# Altium PCB 显示部分Votage diaplay ADC.PcbDoc
Units mm, origin at the board's own origin, x right, y up, seen from the top; angles counter-clockwise.
Board outline 55.5 x 75.5 mm, 2 copper layers (Top Layer, Bottom Layer); 21 components, 0 nets, 99 pads, 0 vias.
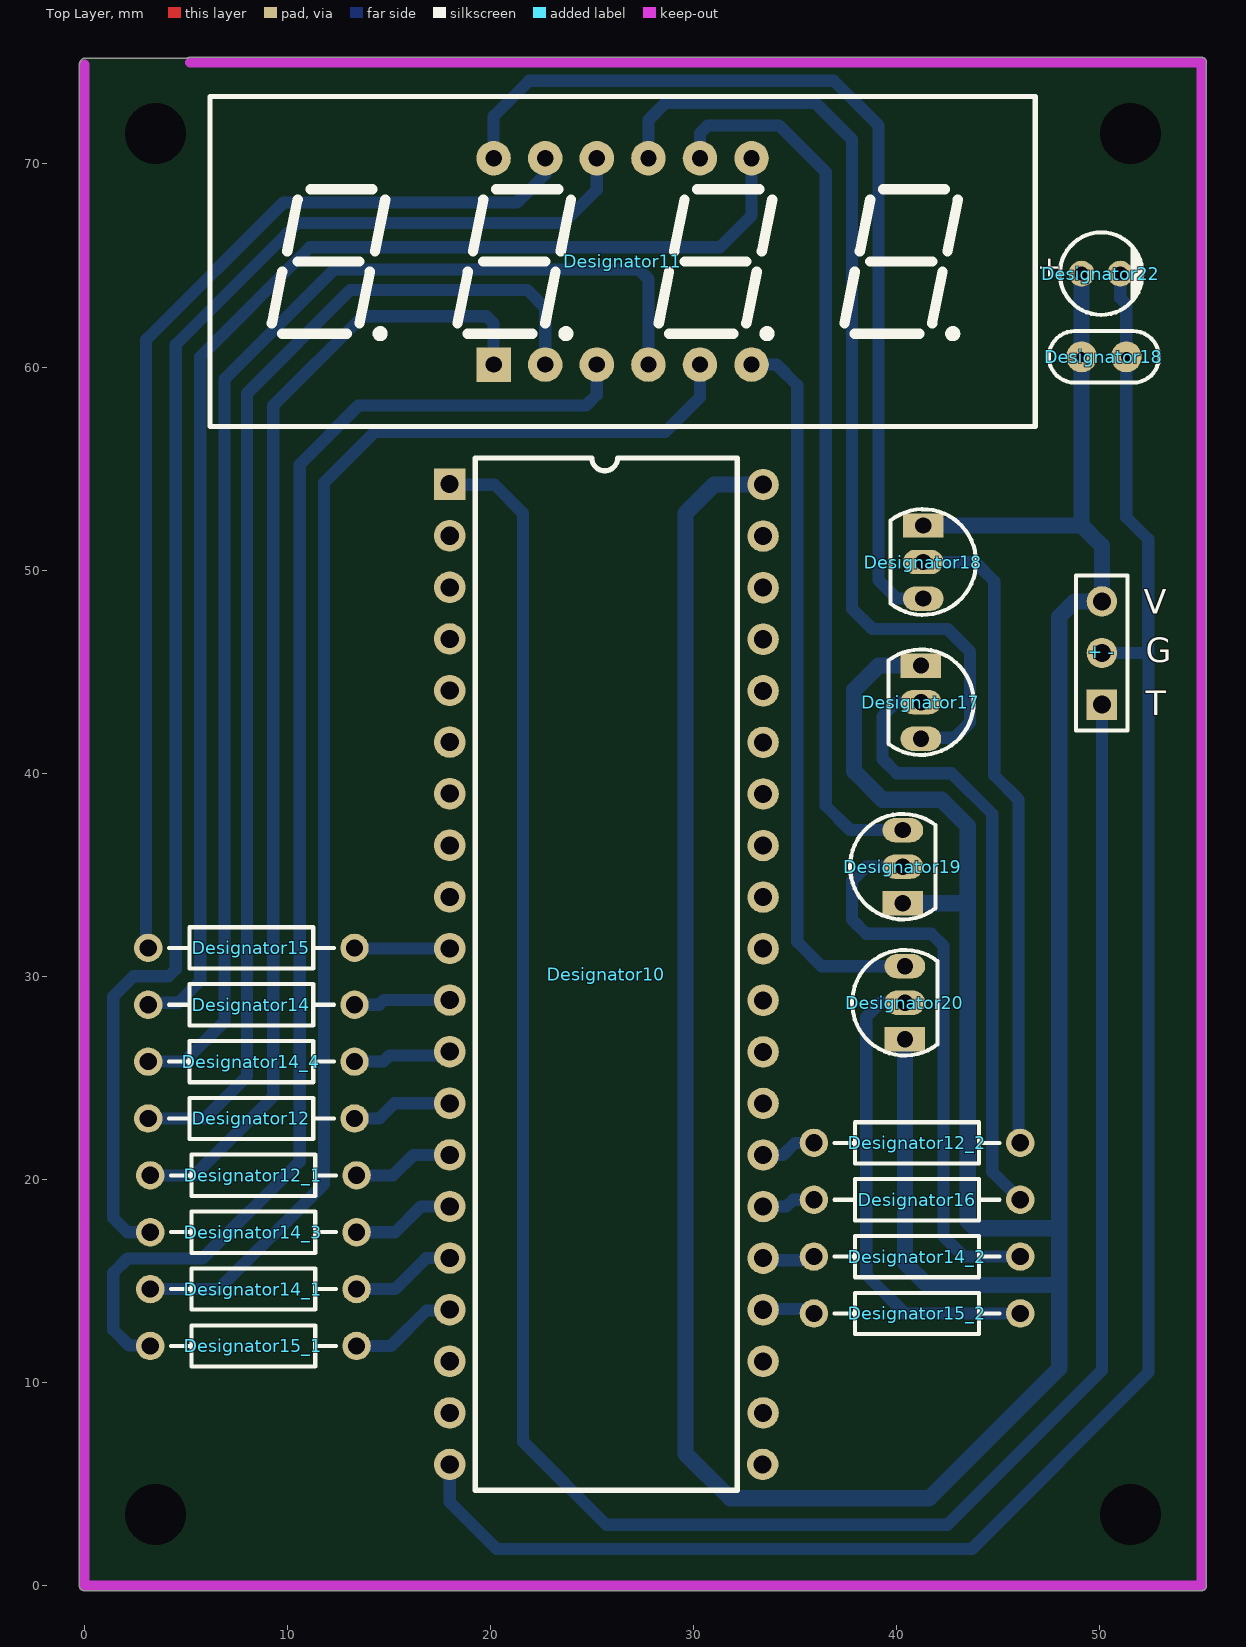
[diagram p0: Top Layer view]
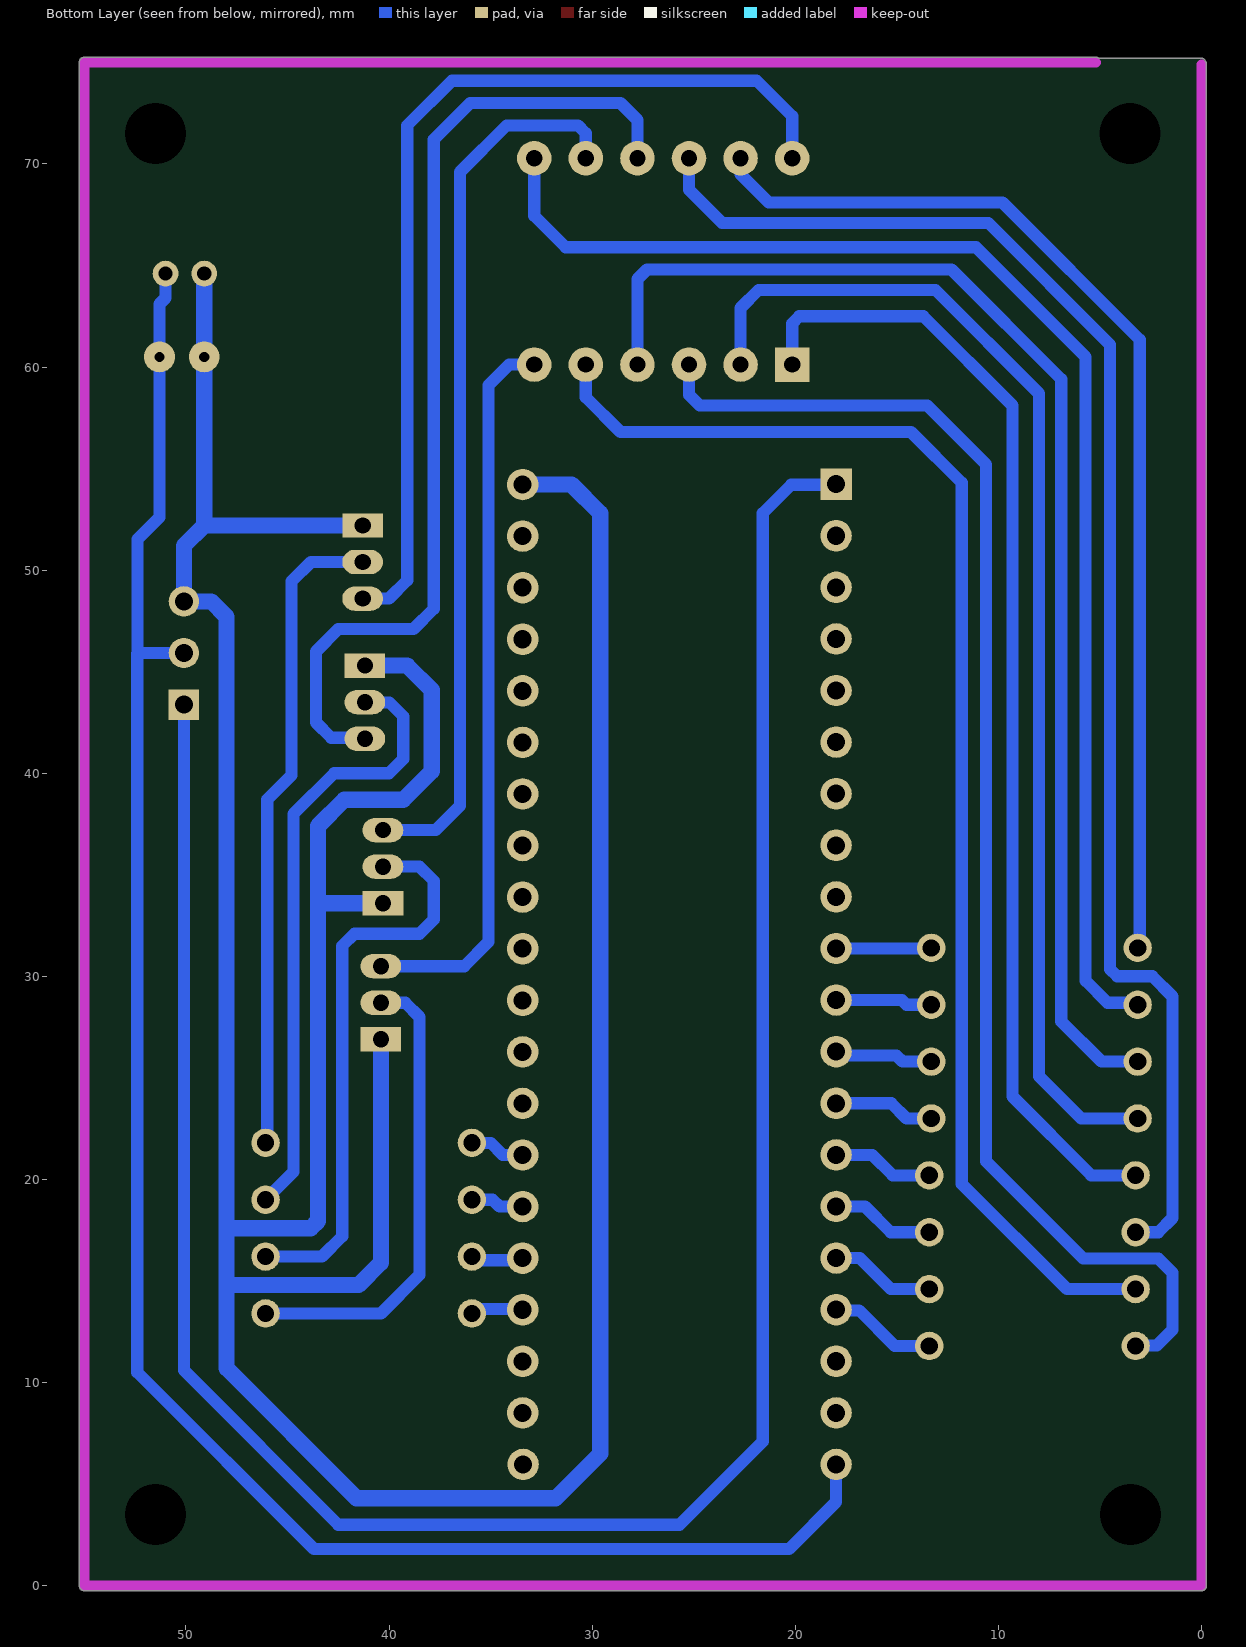
[diagram p1: Bottom Layer view, seen from below]

## Layer stack, top to bottom
Top Solder: solder mask 0.0102, Solder Resist, Dk 3.5
Top Layer: signal copper 0.0356
Dielectric 1: dielectric 0.32, FR-4, Dk 4.8
Bottom Layer: signal copper 0.0356
Bottom Solder: solder mask 0.0102, Solder Resist, Dk 3.5

## Board outline
-0.25,0 -0.25,12.5 cw(c0,12.5) -0.25,12.501 -0.25,62.5 -0.25,74.9 cw(c0,74.9) -0.19,75.063 cw(c0,75) 0,75.2 5.05,75.2 cw(c5.2,75) 5.2,75.25 55,75.25 cw(c55,75) 55.25,75 55.25,0 cw(c55,0) 55,-0.25 0.002,-0.25 cw(c0,0)

## Design rules (kind name [scope] priority, off if disabled: settings)
Clearance [All] p1: gap=0.254 ignorepadtopadclearanceinfootprint=FALSE except(0: Arc-Hole Track-Hole SMDPad-Hole THPad-Hole Via-Hole Fill-Hole Poly-Hole Region-Hole Text-Hole)
PolygonConnect [All] p1: connectstyle=Relief reliefconductorwidth=0.254 reliefentries=4 polygonreliefangle="90 Angle" airgapwidth=0.254
RoutingVias [All] p1: holewidth=0.5 width=1 viastyle="Through Hole" minholewidth=0.3 minwidth=0.5 maxholewidth=0.1 maxwidth=1.2
SolderMaskExpansion [All] p1: expansion=0.102 istentingtop=FALSE
Width [All] p1: maxlimit=1 minlimit=0.3 preferedwidth=0.8 minimp=50.000000 maximp=50.000000 favimp=50.000000
30 further rules are at their usual default settings.

## Components (designator, comment, footprint, x,y, rotation, side; value= is the part's Value field where it differs from the comment)
"+ -" "Comment" HDR1X3 50.1,43.38 r90 top
Designator10 "Comment" "DIP40 - SocKet1" 25.7,30.1 r0 top
Designator11 "Comment" "SMG 0.4-4P" 26.5,65.2 r0 top
Designator12 "Comment" AXIAL-0.4 8.22,23 r180 top
Designator12_1 "Comment" AXIAL-0.4 8.32,20.2 r0 top
Designator12_2 "Comment" AXIAL-0.4 41,21.8 r0 top
Designator14 "Comment" AXIAL-0.4 8.22,28.6 r180 top
Designator14_1 "Comment" AXIAL-0.4 8.32,14.6 r0 top
Designator14_2 "Comment" AXIAL-0.4 41,16.2 r0 top
Designator14_3 "Comment" AXIAL-0.4 8.32,17.4 r0 top
Designator14_4 "Comment" AXIAL-0.4 8.22,25.8 r180 top
Designator15 "Comment" AXIAL-0.4 8.22,31.4 r180 top
Designator15_1 "Comment" AXIAL-0.4 8.32,11.8 r0 top
Designator15_2 "Comment" AXIAL-0.4 41,13.4 r0 top
Designator16 "Comment" AXIAL-0.4 41,19 r0 top
Designator17 "Comment" TO92A 41.19,43.5 r180 top
Designator18 "Comment" "CC 2.2*5" 50.2,60.5 r0 top
Designator18 "Comment" TO92A 41.3,50.4 r180 top
Designator19 "Comment" TO92A 40.3,35.4 r0 top
Designator20 "Comment" TO92A 40.4,28.7 r0 top
Designator22 "Comment" C4X7 49.1,64.6 r0 top

## Footprints (in the part's own frame and the unit in brackets; to place one, negate y for a bottom-side part, rotate by r counter-clockwise, add the part's x,y. Pads: shape width x height; smd on the part's side, far side on the other; paste and mask are expansions set on the pad)
AXIAL-0.4 [mm] "1/4W/1/2W"
  round 1.4 hole 0.85: 1(-5.08,0) 2(5.08,0)
  silkscreen extent -4.06,-1.02 4.06,1.02, body extent -5.38,-1.26 5.38,1.26, height 3.26
C4X7 [mm]
  round 1.27 hole 0.7: 1(0,0) 2(1.905,0)
  silkscreen extent -1.07,-2.03 3,2.03, body extent -1.03,-1.98 2.97,2.02, height 7.01
"CC 2.2*5" [mm] "脚距2.2mm直径5mm"
  round 1.524 hole 0.5: 1(-1.1,0) 2(1.1,0)
  silkscreen extent -2.71,-1.27 2.71,1.27, body extent -2.4,-0.92 2.4,0.92, height 4.8
"DIP40 - SocKet1" [mil]
  rect 61x61 hole 35: 1(-303.88,950.19)
  round 61 hole 35: 2(-303.62,850.17) 3(-303.62,750.15) 4(-303.62,650.13) 5(-303.62,550.11) 6(-303.62,450.09) 7(-303.62,350.07) 8(-303.62,250.05) 9(-303.62,150.03) 10(-303.62,50.01) 11(-303.62,-50.01) 12(-303.62,-150.03) 13(-303.62,-250.05) 14(-303.62,-350.07) 15(-303.62,-450.09) 16(-303.62,-550.11) 17(-303.62,-650.13) 18(-303.62,-750.15) 19(-303.62,-850.17) 20(-303.62,-950.19) 21(303.04,-950.19) 22(303.88,-850.21) 23(303.88,-750.23) 24(303.88,-650.25) 25(303.88,-550.28) 26(303.88,-450.3) 27(303.88,-350.32) 28(303.88,-250.34) 29(303.88,-150.36) 30(303.88,-50.39) 31(303.88,49.59) 32(303.88,149.57) 33(303.88,249.55) 34(303.88,349.53) 35(303.88,449.5) 36(303.88,549.48) 37(303.88,649.46) 38(303.88,749.44) 39(303.88,849.42) 40(303.88,949.39)
  silkscreen extent -254,-1000 254,1001, body extent -347,-999 345,997, height 189
HDR1X3 [mm] "Connector; Header; 3 Position"
  rect 1.5x1.5 hole 0.9: 1(0,0)
  round 1.5 hole 0.9: 2(2.54,0) 3(5.08,0)
  silkscreen extent -1.27,-1.27 6.35,1.27
"SMG 0.4-4P" [mm] "40.5*16*7mm(长宽厚)"
  rect 1.7x1.7 hole 0.8: 1(-6.35,-5.08)
  round 1.7 hole 0.8: 2(-3.81,-5.08) 3(-1.27,-5.08) 4(1.27,-5.08) 5(3.81,-5.08) 6(6.35,-5.08) 7(6.35,5.08) 8(3.81,5.08) 9(1.27,5.08) 10(-1.27,5.08) 11(-3.81,5.08) 12(-6.35,5.08)
  silkscreen extent -20.32,-8.13 20.32,8.13, body extent -20.25,-8 20.25,8, height 7
TO92A [mm] "92晶体管"
  rect 2x1.2 hole 0.8: 1(0,-1.8)
  oval 2x1.2 hole 0.8: 2(0,0) 3(0,1.8)
  silkscreen extent -2.6,-2.6 1.6,2.6, body extent -2.3,-2.3 1.3,2.3, height 7.6

## Free pads (board coordinates)
  round 0.1 hole 3: 2(51.5,71.5) 3(51.5,3.5) 4(3.51,71.499) 5(3.5,3.5)

## Nets (pads, with @x,y where several pads share a name; then routed paths per layer and width w, separated by ;. In a path a pad name is that pad's centre, name@x,y a point inside that pad or via, vN(x,y) a via of type N, cw(c..) or ccw(c..) an arc to the next point about the centre after c; other vN are vias at no path point)
pads on no net: "+ -.1" "+ -.2" "+ -.3" Designator10.1 Designator10.2 Designator10.3 Designator10.4 Designator10.5 Designator10.6 Designator10.7 Designator10.8 Designator10.9 Designator10.10 Designator10.11 Designator10.12 Designator10.13 Designator10.14 Designator10.15 Designator10.16 Designator10.17 Designator10.18 Designator10.19 Designator10.20 Designator10.21 Designator10.22 Designator10.23 Designator10.24 Designator10.25 Designator10.26 Designator10.27 Designator10.28 Designator10.29 Designator10.30 Designator10.31 Designator10.32 Designator10.33 Designator10.34 Designator10.35 Designator10.36 Designator10.37 Designator10.38 Designator10.39 Designator10.40 Designator11.1 Designator11.2 Designator11.3 Designator11.4 Designator11.5 Designator11.6 Designator11.7 Designator11.8 Designator11.9 Designator11.10 Designator11.11 Designator11.12 Designator12.1 Designator12.2 Designator12_1.1 Designator12_1.2 Designator12_2.1 Designator12_2.2 Designator14.1 Designator14.2 Designator14_1.1 Designator14_1.2 Designator14_2.1 Designator14_2.2 Designator14_3.1 Designator14_3.2 Designator14_4.1 Designator14_4.2 Designator15.1 Designator15.2 Designator15_1.1 Designator15_1.2 Designator15_2.1 Designator15_2.2 Designator16.1 Designator16.2 Designator17.1 Designator17.2 Designator17.3 Designator18.1 Designator18.2 Designator18.3 Designator19.1 Designator19.2 Designator19.3 Designator20.1 Designator20.2 Designator20.3 Designator22.1 Designator22.2
copper on no net: | length 1260.2
  Bottom Layer w0.6: 3.04,31.4 3.04,61.34 9.8,68.1 21.3,68.1 22.69,69.49 22.69,70.28 ; 3.14,23 5.92,23 8,25.08 8,58.7 13.1,63.8 21.8,63.8 22.69,62.91 22.69,60.12 ; 3.14,25.8 4.92,25.8 6.9,27.78 6.9,59.4 12.3,64.8 27.3,64.8 27.77,64.33 27.77,60.12 ; 3.14,28.6 3.24,28.7 4.62,28.7 5.7,29.78 5.7,60.5 11.1,65.9 31.3,65.9 32.85,67.45 32.85,70.28 ; 3.24,11.8 3.219,11.821 2.199,11.821 1.42,12.6 1.42,15.4 2.12,16.1 5.82,16.1 10.6,20.88 10.6,55.2 13.5,58.1 24.7,58.1 25.23,58.63 25.23,60.12 ; 3.24,14.6 6.62,14.6 11.8,19.78 11.8,54.3 14.3,56.8 28.6,56.8 30.31,58.51 30.31,60.12 ; 3.24,17.4 2.12,17.4 1.42,18.1 1.42,29 2.42,30 4.149,30 4.5,30.351 4.5,61.1 10.5,67.1 23.6,67.1 25.23,68.73 25.23,70.28 ; 3.24,20.2 5.42,20.2 9.3,24.08 9.3,58.1 13.7,62.5 19.8,62.5 20.15,62.15 20.15,60.12 ; 13.3,23 14.52,23 15.269,23.749 15.849,23.749 17.988,23.749 ; 13.3,25.8 14.72,25.8 15.02,26.1 15.6,26.1 17.799,26.1 ; 13.3,28.6 14.52,28.6 14.75,28.83 17.988,28.83 ; 13.3,31.37 17.988,31.37 ; 13.4,11.8 14.52,11.8 15.1,11.8 16.853,13.553 17.954,13.553 17.988,13.587 ; 13.4,14.6 14.72,14.6 15.3,14.6 16.827,16.127 17.988,16.127 ; 13.4,17.4 14.72,17.4 15.3,17.4 16.568,18.668 17.988,18.668 ; 13.4,20.2 14.62,20.2 15.2,20.2 16.208,21.208 17.988,21.208 ; 17.982,54.235 18.016,54.2 20.2,54.2 21.6,52.8 21.6,7.1 25.7,3 42.5,3 50.1,10.6 50.1,34.1 50.1,43.38 ; 17.988,5.965 17.988,4.112 20.3,1.8 43.7,1.8 52.4,10.5 52.4,45.9 52.38,45.92 ; 20.15,70.28 20.15,72.35 21.9,74.1 36.9,74.1 39.1,71.9 39.1,49.5 40,48.6 41.3,48.6 ; 27.77,70.28 27.77,72.17 28.6,73 36,73 37.8,71.2 37.8,48.1 38.8,47.1 42.5,47.1 43.6,46 43.6,42.5 42.849,41.749 41.449,41.749 41.3,41.6 ; 30.31,70.28 30.31,71.51 30.7,71.9 34.2,71.9 36.5,69.6 36.5,38.4 37.7,37.2 40.7,37.2 ; 32.85,60.12 34.08,60.12 35.1,59.1 35.1,56.7 35.1,31.7 36.3,30.5 40.4,30.5 ; 33.4,16.141 33.641,15.9 ; 33.418,13.584 33.455,13.62 35.7,13.62 ; 33.418,18.662 34.562,18.662 34.9,19 35.92,19 ; 33.418,21.202 34.398,21.202 34.996,21.8 35.92,21.8 ; 33.521,16.021 35.741,16.021 ; 40.4,28.7 39.2,28.7 38.5,28 38.5,15.3 40.4,13.4 43.9,13.4 46.08,13.4 ; 40.7,35.4 38.5,35.4 37.8,34.7 37.8,32.8 38.5,32.1 41.7,32.1 42.3,31.5 42.3,17.2 43.3,16.2 46.08,16.2 ; 41.19,43.5 41.179,43.489 39.989,43.489 39.3,42.8 39.3,40.7 40,40 42.7,40 44.7,38 44.7,20.38 46.08,19 ; 41.3,50.4 43.849,50.4 44.8,49.449 44.8,39.9 46,38.7 46,21.88 46.08,21.8 ; 50.1,45.92 52.38,45.92 ; 51.005,64.6 51.005,63.395 51.3,63.1 51.3,60.6 ; 51.3,60.5 51.3,52.6 52.38,51.52 52.38,45.92
  Bottom Layer w0.8: 33.418,54.215 31.015,54.215 29.6,52.8 29.6,6.5 31.8,4.3 41.6,4.3 48,10.7 48,14.8 48,17.6 48,47.7 48.76,48.46 50.1,48.46 50.1,51.2 49.1,52.2 ; 40.3,33.6 43.5,33.6 ; 40.4,26.9 40.4,15.9 41.5,14.8 47.9,14.8 ; 41.3,45.3 39.1,45.3 37.9,44.1 37.9,40.1 39.3,38.7 42.2,38.7 43.5,37.4 43.5,33.6 ; 41.3,52.2 49.1,52.2 ; 47.9,17.6 43.851,17.6 43.5,17.951 43.5,33.6 ; 49.1,60.5 49.1,52.2 ; 49.1,60.6 49.1,64.6

## Keep-outs
Keep-Out Layer:
  lines w0.5: 0,74.9 0,62.5 0,12.5 0,0 55,0 55,75 5.2,75

## Silkscreen, mask and mechanical layers (free items; w line width, h text height)
Top Overlay:
  text "V" at 52.154,47.854 h1.2
  text "G" at 52.254,45.454 h1.2
  text "T" at 52.254,42.854 h1.2
Mechanical 1:
  lines w0.4: 0,0 0,12.5 0,62.5 0,75 55,75 55,0 0,0

## Text inside footprints (layer, text, board x,y; h text height)
Designator22: Top Overlay "+" at 47.982,64.295 h1.02 r90